# Altium PCB ATLAS_XP2V5_sredjen_bom.PcbDoc (part 3 of 4)
Units mil, origin at the board's own origin, x right, y up, seen from the top; angles counter-clockwise.
Board outline 6380 x 9190 mil, 4 copper layers (Primary Component Side, Ground Plane, Power Plane, Secondary Component Side), stack 35.4 mil thick; 203 components, 228 nets, 1212 pads, 912 vias.
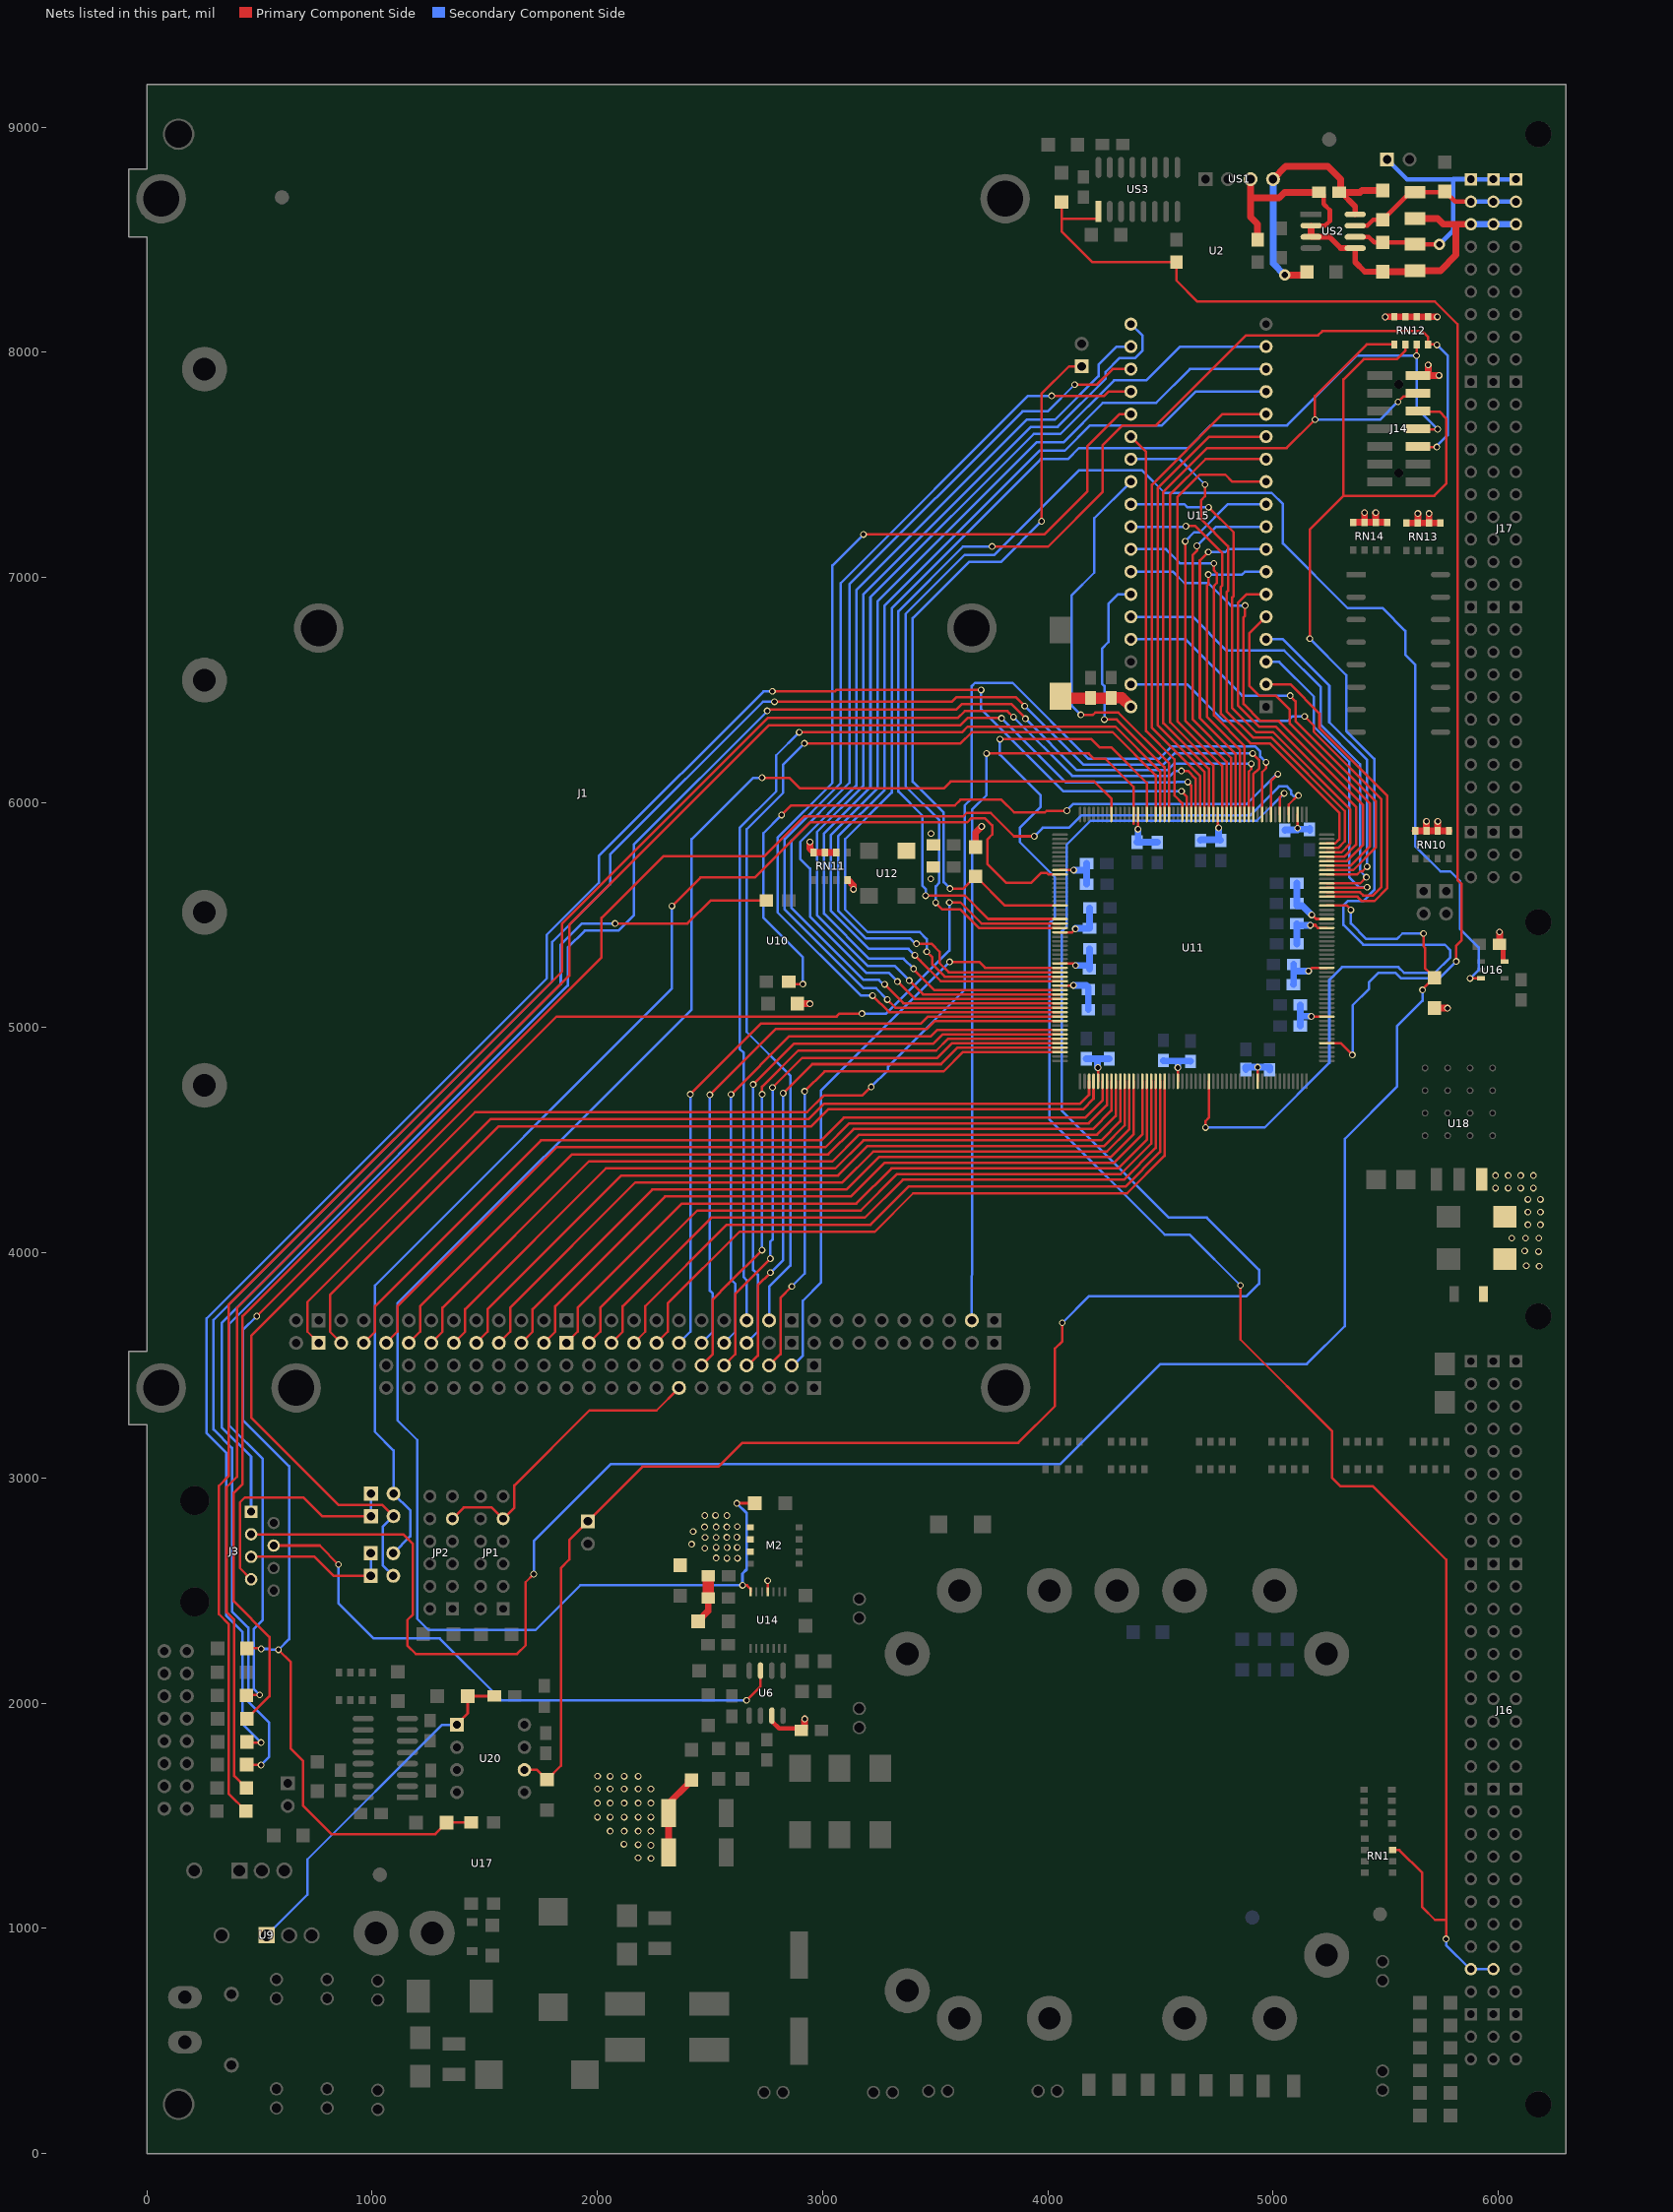
[diagram p5: the nets of this part, all layers, seen from the top]

## Via types
v1: diameter 30, hole 20, Primary Component Side to Secondary Component Side, 910 vias
v2: diameter 50, hole 28, Primary Component Side to Secondary Component Side, 2 vias

## Nets (pads, with @x,y where several pads share a name; then routed paths per layer and width w, separated by ;. In a path a pad name is that pad's centre, name@x,y a point inside that pad or via, vN(x,y) a via of type N, cw(c..) or ccw(c..) an arc to the next point about the centre after c; other vN are vias at no path point) (continued)
IRQ15: J1.D6 JP1.9 JP2.9 | length 1346
  Primary Component Side w11: JP2.9@1356.25,2818.75 1406.25,2868.75 1531.25,2868.75 JP1.9@1581.25,2818.75 1631.25,2868.75 1631.25,2967 1964.25,3300 2262.5,3300 J1.D6@2362.5,3400
LA17: J1.A14 U11.199 | length 2818.7
  Primary Component Side w11: v1(2499.15,4702.12) 2790.78,4993.75 3462.5,4993.75 3498.55,5029.8 U11.199@4053.75,5029.8
  Secondary Component Side w11: J1.A14@2462.5,3600 2512.5,3650 2512.5,3818.75 2499.15,3832.1 v1(2499.15,4702.12)
LA18: J1.A13 U11.201 | length 2711.9
  Primary Component Side w11: v1(2593.15,4703.3) 2852.35,4962.5 3481.25,4962.5 3509.15,4990.4 U11.201@4053.75,4990.4
  Secondary Component Side w11: J1.A13@2562.5,3600 2612.5,3650 2612.5,3862.5 2593.75,3881.25 2593.75,4703.3 v1(2593.15,4703.3)
LA19: J1.A12 U11.202 | length 2631.5
  Primary Component Side w11: v1(2691.61,4747.64) 2871.97,4928 3490.5,4928 3533.2,4970.7 U11.202@4053.75,4970.7
  Secondary Component Side w11: J1.A12@2662.5,3600 2712.5,3650 2712.5,3903 2691.61,3923.89 v1(2691.61,4747.64)
LA20: J1.C5 U11.203 | length 2759.9
  Primary Component Side w11: J1.C5@2462.5,3500 2512.5,3550 2512.5,3793.75 2581.25,3862.5 2581.5,3862.5 v1(2731.25,4012.25) ; v1(2731.49,4704.48) 2731.49,4737.5 2891.99,4898 3504.25,4898 3557.25,4951 U11.203@4053.75,4951
  Secondary Component Side w11: v1(2731.25,4012.25) 2731.25,4704.48 v1(2731.49,4704.48)
LA21: J1.C4 U11.204 | length 2690.2
  Primary Component Side w11: J1.C4@2562.5,3500 2612.5,3550 2612.5,3818.75 2612.75,3818.75 v1(2768,3974.5) ; v1(2777.6,4734.04) 2909.56,4866 3509.75,4866 3575.05,4931.3 U11.204@4053.75,4931.3
  Secondary Component Side w11: v1(2768,3974.5) 2768,4050 2777.6,4059.6 v1(2777.6,4734.04) ; v1(2777.6,4734.04) 2776.72,4733.72 2774.57,4737.07 v1(2777.6,4734.04)
LA22: J1.C3 U11.205 | length 2592.8
  Primary Component Side w11: J1.C3@2662.5,3500 2668.75,3500 2712.5,3543.75 2712.5,3856.25 2768,3911.75 v1(2768,3912) ; v1(2825.15,4708.95) 2954.21,4838 3525.5,4838 3599.1,4911.6 U11.205@4053.75,4911.6
  Secondary Component Side w11: v1(2768,3912) 2768.25,3912 2825,3968.75 2825,4708.95 v1(2825.15,4708.95)
LA23: J1.C2 U11.206 | length 2488.7
  Primary Component Side w11: J1.C2@2762.5,3500 2812.5,3550 2812.5,3800.5 v1(2863,3851) ; v1(2919.75,4717.22) 3008.52,4806 3537.25,4806 3623.15,4891.9 U11.206@4053.75,4891.9
  Secondary Component Side w11: v1(2863,3851) 2919.75,3907.75 v1(2919.75,4717.22)
LED_24VDC: R8.2 R11.2 U11.177 U17.4 | length 7804.2
  Primary Component Side w11: R11.2@443.53,2243.38 504.71,2243.38 v1(507.25,2240.85) ; v1(487.5,3718.75) 1818.75,5050 3062.5,5050 3075,5062.5 v1(3175,5062.5) ; v1(583.77,2236.95) 637.41,2183.31 637.41,1798.92 693.75,1742.58 693.75,1543.75 818.75,1418.75 1280,1418.75 R8.2@1330,1468.75 1330,1469.51 U17.4@1439.48,1469.51 U17.4@1439.48,1468.75 ; v1(3562.5,5556.25) 3612.5,5556.25 3705.55,5463.2 U11.177@4053.75,5463.2
  Secondary Component Side w11: v1(487.5,3718.75) 426,3657.25 426,3258 631.25,3052.75 631.25,2284.43 v1(583.77,2236.95) 547.46,2236.95 543.56,2240.85 v1(507.25,2240.85) ; v1(3175,5062.5) 3282.02,5062.5 3562.5,5342.98 v1(3562.5,5556.25)
LED_KVR: R18.1 U11.131 | length 7896.7
  Primary Component Side w11: R18.1@441.31,1622.97 387.5,1676.78 387.5,2370 353,2404.5 353,2959 400,3006 400,3756.25 1875,5231.25 1875,5456.25 2762.5,6343.75 3612.5,6343.75 3643.75,6375 3794.25,6375 v1(3794.25,6374.66) ; v1(4621.34,6090.98) 4636.25,6076.07 U11.131@4636.25,5947.2
  Secondary Component Side w11: v1(3794.25,6374.66) 4079.89,6089.02 4568.75,6089.02 4570.86,6091.13 4621.08,6091.13 v1(4621.34,6090.98)
LED_LPT: R20.1 U11.132 | length 8065.4
  Primary Component Side w11: R20.1@443.57,1827.77 443.57,1825 v1(506.25,1825) ; v1(2776.94,6494.01) 2787.5,6493.75 3054.66,6493.75 3060.59,6499.68 v1(3703.83,6499.68) ; v1(4593.75,6050) 4616.55,6027.2 U11.132@4616.55,5947.2
  Secondary Component Side w11: v1(506.25,1825) 425,1906.25 425,2315 351,2389 351,3113 265,3199 265,3708.75 1775,5218.75 1775,5412.5 2006.25,5643.75 2006.25,5762.5 2737.5,6493.75 2776.94,6493.75 v1(2776.94,6494.01) ; v1(3703.83,6499.68) 3703.83,6414.92 4068.75,6050 v1(4593.75,6050)
LED_MASTER_ENABLE: R21.1 U11.109 | length 7895.7
  Primary Component Side w11: R21.1@443.57,1931.25 R21.1@443.57,1930.17 543.75,2030.35 543.75,2294 385,2452.75 385,2934 425,2974 425,3718.75 2018.75,5312.5 2018.75,5487.5 2293.75,5762.5 2742,5762.5 2917.5,5938 3624,5938 3640,5954 3746,5954 3849.8,5850.2 v1(3940.04,5850.2) ; U11.109@5069.65,5947.2 5069.65,5991.04 5109.86,6031.25 v1(5112.5,6031.25)
  Secondary Component Side w11: v1(3940.04,5850.2) 3977.34,5887.5 4093.75,5887.5 4150,5943.75 4899.3,5943.75 5026.74,6071.2 5061.94,6071.2 5081.58,6051.56 5081.58,6037.5 5091.59,6027.49 5110.23,6027.49 v1(5112.5,6031.25)
LED_PWR_GOOD_TPS: R22.1 U11.118 | length 8126.5
  Primary Component Side w11: R22.1@442.01,2034.22 442.01,2037.5 500.5,2037.5 v1(500.5,2036.47) ; v1(2753.72,6406.96) 2759.79,6411.25 2759.79,6412.5 3593.75,6412.5 3618.75,6437.5 3837.5,6437.5 3900.87,6374.13 v1(3900.87,6372.01) ; U11.118@4892.35,5947.2 4892.35,6137.5 4903.52,6148.67 v1(4903.52,6171.93)
  Secondary Component Side w11: v1(500.5,2036.47) 475,2061.97 475,2330 514,2369 514,3085 365,3234 365,3683.75 1868.75,5187.5 1868.75,5356.25 1943.75,5431.25 2093.75,5431.25 2161.04,5498.54 2161.04,5812.5 2754.61,6406.07 v1(2753.72,6406.96) ; v1(3900.87,6372.01) 4129.12,6143.75 4531.25,6143.75 4559.43,6171.93 v1(4903.52,6171.93)
LED_RAD: R17.1 U11.130 | length 8127.9
  Primary Component Side w11: R17.1@439.8,1520.57 362.5,1597.87 362.5,2352 319,2395.5 319,2965 362.5,3008.5 362.5,3768.75 1843.75,5250 1843.75,5462.5 2756.25,6375 3600,6375 3631.25,6406.25 3820.92,6406.25 v1(3847.43,6379.74) ; v1(4593.23,6140.35) 4621.92,6140.35 4655.95,6106.33 U11.130@4655.95,5947.2
  Secondary Component Side w11: v1(3847.43,6379.74) 4108.42,6118.75 4543.75,6118.75 4565.35,6140.35 v1(4593.23,6140.35)
LED_WDT: R19.1 U11.117 | length 8551.4
  Primary Component Side w11: R19.1@453.44,1737.5 R19.1@442.81,1726.87 442.81,1725 v1(506.25,1725) ; v1(2786.1,6447.28) 2802,6447.32 3573,6447.32 3594.43,6468.75 3857.14,6468.75 v1(3897.24,6428.65) ; v1(4909.43,6217.89) 4937.5,6189.82 4937.5,6150.45 4912.05,6125 U11.117@4912.05,5947.2
  Secondary Component Side w11: v1(506.25,1725) 543,1761.75 543,1913.25 450,2006.25 450,2335 378,2407 378,3133 296,3215 296,3702.25 1800,5206.25 1800,5381.25 2056.25,5637.5 2056.25,5768.75 2734.82,6447.32 v1(2786.1,6447.28) ; v1(3897.24,6428.65) 4157.14,6168.75 4512.5,6168.75 4561.64,6217.89 v1(4909.43,6217.89)
LS: J3.4 U6.7 | length 2644
  Primary Component Side w11: J3.4@562.5,2700 767.31,2700 767.31,2699.14 v1(850.12,2615.96) ; v1(2662.3,2012.24) 2724.26,2074.2 U6.7@2724.26,2144.45
  Secondary Component Side w11: v1(850.12,2615.96) 850.12,2443.75 1006.37,2287.5 1300,2287.5 1575.23,2012.27 v1@2662.27,2012.27
MASTER_ENABLE: U10.2 U11.113 | length 3465.7
  Primary Component Side w11: v1(2817.73,5944.79) 2860.44,5987.5 3587.5,5987.5 3612.5,6012.5 3793.75,6012.5 3850,5956.25 3987.5,5956.25 3995.06,5963.81 4084.76,5963.81 v1(4084.85,5963.73) ; U10.2@2849.89,5204.69 2849.89,5193.75 v1(2912.5,5193.75) ; U11.113@4990.85,5947.2 4990.85,5984.7 4990.63,5984.91 4990.63,6095.23 v1(5021.44,6126.03)
  Secondary Component Side w11: v1(2817.73,5944.79) 2737.5,5864.56 2737.5,5487.5 2912.5,5312.5 v1(2912.5,5193.75) ; v1(4084.85,5963.73) 4078.68,5958.97 4077.57,5958.82 4112.5,5993.75 4883.64,5993.75 5016.01,6126.12 v1(5021.44,6126.03)
MASTER_ENABLE_OUT: J3.1 U10.4 | length 4190
  Primary Component Side w11: v1(2078.11,5462.68) 2400.18,5462.68 2502.19,5564.69 U10.4@2749.89,5564.69
  Secondary Component Side w12: J3.1@462.5,2850 462.5,3095 332,3225.5 332,3688.25 1837.5,5193.75 1837.5,5368.75 1931.43,5462.68 v1(2078.11,5462.68)
MRST: J16.B28 J16.C28 RN1.7 U11.141 | length 8008.3
  Primary Component Side w10.9: v1(3787.33,6281.51) 3837.5,6281.25 4193.75,6281.25 4231.25,6243.75 4283,6243.75 4439.25,6087.5 U11.141@4439.25,5947.2 ; v1(4855.42,3855.22) 4855.42,3614.95 5262.5,3207.87 5262.5,3000 5300,2962.5 5443.75,2962.5 5768.75,2637.5 5768.75,1037.5 ; RN1.7@5530.79,1347.4 5530.79,1347.51 5561.03,1347.51 5662.5,1246.04 5662.5,1093.75 5718.75,1037.5 5768.75,1037.5 ; v1(5768.24,952.62) 5769.14,952.92 5768.75,953.31 5768.75,1037.5
  Secondary Component Side w10.9: v1(3787.33,6281.51) 3787.33,6212.67 3968.75,6031.25 3968.75,5981.25 3875,5887.5 3875,5825 4031.25,5668.75 4031.25,5487.5 4006.25,5462.5 4006.25,4593.75 4518.75,4081.25 4629.39,4081.25 v1(4855.42,3855.22) ; v1(5768.24,952.62) 5768.44,952.92 5768.44,925.31 5875,818.75 5878.25,818.75 J16.C28@5878.5,818.5 J16.B28@5978.5,818.5
MS_IN_1: J3.3 R15.1 U11.88 | length 8724.2
  Primary Component Side w11: J3.3@462.5,2750 1137.5,2750 1181.25,2706.25 1181.25,2393.75 1156.25,2368.75 1156.25,2256.25 1193.75,2218.75 1643.75,2218.75 1681.25,2256.25 1681.25,2537.03 v1(1717.32,2573.1) ; U11.88@5238.45,5542 5328.56,5542 5347.76,5522.8 v1(5345.84,5522.8) ; v1(5667.82,5418.4) 5667.82,5361.79 5674.78,5354.83 5674.78,5264.45 5692.68,5246.56 5692.68,5222.06 R15.1@5717.18,5222.06
  Primary Component Side w12: v1(5663.45,5167.87) 5662.74,5167.87 5662.74,5171 5697.44,5205.69 5717.18,5205.69 R15.1@5717.18,5222.06
  Secondary Component Side w11: v1(1717.32,2573.1) 1717.32,2718.75 2061.07,3062.5 4056.25,3062.5 4500,3506.25 5150,3506.25 5318.75,3675 5318.75,4506.25 5550,4737.5 5550,5006.25 5663.45,5119.7 v1(5663.45,5167.87) ; v1(5345.84,5522.8) 5345.84,5462.5 5414.59,5393.75 5550,5393.75 5574.65,5418.4 v1(5667.82,5418.4)
NVRAM_ADDRESS0: U11.129 U15.14 | length 2189
  Primary Component Side w11: U11.129@4675.65,5947.2 4675.65,6118.75 4462.5,6331.9 4462.5,7412 4775.5,7725 U15.14@4968.75,7725
NVRAM_ADDRESS1: U11.128 U15.13 | length 2111
  Primary Component Side w11: U11.128@4695.35,5947.2 4695.35,6135.9 4487.5,6343.75 4487.5,7396 4716.5,7625 U15.13@4968.75,7625
NVRAM_ADDRESS2: U11.126 U15.12 | length 1990.4
  Primary Component Side w11: U11.126@4734.75,5947.2 4734.75,6165.25 4543.75,6356.25 4543.75,7368.75 4700,7525 U15.12@4968.75,7525
NVRAM_ADDRESS3: U11.124 U15.11 | length 1939.7
  Primary Component Side w11: U11.124@4774.15,5947.2 4774.15,6163.35 4575,6362.5 4575,7356.25 4675,7456.25 4787.5,7456.25 4818.75,7425 U15.11@4968.75,7425
NVRAM_ADDRESS4: U11.123 U15.10 | length 1716.9
  Primary Component Side w11: v1(4609.68,7160.05) 4610.25,7160.11 4610.25,6364.75 4793.85,6181.15 U11.123@4793.85,5947.2
  Secondary Component Side w11: v1(4609.68,7160.05) 4649.63,7200 4675,7200 4800,7325 U15.10@4968.75,7325
NVRAM_ADDRESS5: U11.122 U15.9 | length 1612.7
  Primary Component Side w11: v1(4662,7140) 4662,7118.25 4643.75,7100 4643.75,6368.75 4813.55,6198.95 U11.122@4813.55,5947.2
  Secondary Component Side w11: v1(4662,7140) 4747,7225 U15.9@4968.75,7225
NVRAM_ADDRESS6: U11.121 U15.8 | length 1507.8
  Primary Component Side w11: v1(4712.5,7112.5) 4675,7075 4675,6375 4833.25,6216.75 U11.121@4833.25,5947.2
  Secondary Component Side w11: v1(4712.5,7112.5) 4787.5,7112.5 4800,7125 U15.8@4968.75,7125
NVRAM_ADDRESS7: U11.120 U15.7 | length 1390.1
  Primary Component Side w11: v1(4712.5,7012.5) 4712.5,6968.75 4706.25,6962.5 4706.25,6381.25 4852.95,6234.55 U11.120@4852.95,5947.2
  Secondary Component Side w11: v1(4712.5,7012.5) 4862.5,7012.5 4875,7025 U15.7@4968.75,7025
NVRAM_ADDRESS8: U11.119 U15.29 | length 1576.3
  Primary Component Side w11: v1(4737.5,7062.5) 4737.5,7031.25 4750,7018.75 4750,6975 4737.5,6962.5 4737.5,6387.5 4872.65,6252.35 U11.119@4872.65,5947.2
  Secondary Component Side w11: U15.29@4368.75,7125 4525,7125 4587.5,7062.5 v1(4737.5,7062.5)
NVRAM_ADDRESS9: U11.102 U15.28 | length 2063.4
  Primary Component Side w11: v1(4613.33,7227.61) 4655,7227.61 4775,7107.61 4775,6964.29 4768.75,6958.04 4768.75,6393.75 4900,6262.5 4986.19,6262.5 5293.75,5954.94 5293.75,5836.43 5275.12,5817.8 U11.102@5238.45,5817.8
  Secondary Component Side w11: U15.28@4368.75,7225 4612.5,7225 4612.87,7227.67 4612.91,7227.95 v1(4613.33,7227.61)
NVRAM_ADDRESS10: U11.101 U15.25 | length 2376.7
  Primary Component Side w11: v1(4697.92,7412.34) 4697.92,7359.95 4681.25,7343.28 4681.25,7257.18 4800,7138.43 4800,6941.09 4793.75,6934.84 4793.75,6406.25 4912.5,6287.5 4993.75,6287.5 5318.75,5962.5 5318.75,5827.9 5288.95,5798.1 U11.101@5238.45,5798.1
  Secondary Component Side w11: U15.25@4368.75,7525 4585.26,7525 v1(4697.92,7412.34)
NVRAM_ADDRESS11: U11.100 U15.27 | length 2275.3
  Primary Component Side w11: v1(4714,7311) 4825,7200 4825,6917.25 4818.75,6911 4818.75,6418.75 4925,6312.5 5000,6312.5 5343.75,5968.75 5343.75,5818.75 5303.4,5778.4 U11.100@5238.45,5778.4
  Secondary Component Side w11: U15.27@4368.75,7325 4606.25,7325 4620.25,7311 v1(4714,7311)
NVRAM_ADDRESS12: U11.99 U15.6 | length 1628.6
  Primary Component Side w11: U15.6@4968.75,6925 4882.87,6925 4843.75,6885.88 4843.75,6431.25 4937.5,6337.5 5012.5,6337.5 5368.75,5981.25 5368.75,5812.5 5314.95,5758.7 U11.99@5238.45,5758.7
NVRAM_ADDRESS13: U11.98 U15.30 | length 2094.5
  Primary Component Side w11: v1(4876,6875) 4876,6829.93 4868.75,6822.68 4868.75,6437.5 4943.75,6362.5 5025,6362.5 5400,5987.5 5400,5812.5 5326.5,5739 U11.98@5238.45,5739
  Secondary Component Side w11: U15.30@4368.75,7025 4556.25,7025 4606.25,6975 4712.5,6975 4812.5,6875 v1(4876,6875)
NVRAM_ADDRESS14: U11.97 U15.5 | length 1545.2
  Primary Component Side w11: U15.5@4968.75,6825 4893.75,6750 4893.75,6518.75 4937.5,6475 5012.5,6475 5075,6412.5 5075,6350 5431.25,5993.75 5431.25,5806.25 5344.3,5719.3 U11.97@5238.45,5719.3
NVRAM_ADDRESS15: U11.96 U15.33 | length 1903.1
  Primary Component Side w11: v1(5076,6475) 5075.5,6474.5 5100,6450 5100,6362.5 5456.25,6006.25 5456.25,5800 5355.85,5699.6 U11.96@5238.45,5699.6
  Secondary Component Side w11: U15.33@4368.75,6725 4612.5,6725 4862.5,6475 v1(5076,6475)
NVRAM_ADDRESS16: U11.95 U15.4 | length 1442.8
  Primary Component Side w11: U11.95@5238.45,5679.9 5372.61,5679.9 5386.46,5693.75 5397.02,5693.75 v1(5418.1,5714.84) 5417.86,5706.75 v1@5417.98,5706.75
  Secondary Component Side w11: U15.4@4968.75,6725 5043.75,6725 5250,6518.75 5250,6356.25 5417.71,6188.54 5417.71,5714.84 v1(5418.1,5714.84)
NVRAM_ADDRESS17: U11.93 U15.32 | length 2088.3
  Primary Component Side w11: U11.93@5238.45,5640.5 5386.47,5640.5 v1(5414.24,5668.28)
  Secondary Component Side w11: U15.32@4368.75,6825 4643.75,6825 4793.75,6675 5050,6675 5212.5,6512.5 5212.5,6343.75 5386.56,6169.69 5386.56,5695.96 v1(5414.24,5668.28)
NVRAM_ADDRESS18: U11.92 U15.3 | length 1422.7
  Primary Component Side w11: U11.92@5238.45,5620.8 5413.69,5620.8 5413.73,5620.76 5416.53,5623.56 v1(5417.8,5623.71)
  Secondary Component Side w11: U15.3@4968.75,6625 5027,6625 5181.25,6470.75 5181.25,6337.5 5337.5,6181.25 5337.5,5668.75 5382.69,5623.56 5416.53,5623.56 v1(5417.8,5623.71)
NVRAM_ADDRESS19: U11.91 U15.35 | length 2009.3
  Primary Component Side w11: v1(5140.12,6382.51) 5181.25,6341.38 5181.25,6314.5 5481.25,6014.5 5481.25,5625 5443.75,5587.5 5400,5587.5 5386.4,5601.1 U11.91@5238.45,5601.1
  Secondary Component Side w11: U15.35@4368.75,6525 4618.75,6525 4780.75,6363 5066,6363 5085.51,6382.51 v1(5140.12,6382.51)
NVRAM_ADDRESS20: U11.90 U15.2 | length 1491
  Primary Component Side w11: U15.2@4968.75,6525 5076.68,6525 5206.25,6395.43 5206.25,6331.25 5506.25,6031.25 5506.25,5618.75 5450,5562.5 5393.9,5562.5 5375,5581.4 U11.90@5238.45,5581.4
NVRAM_CE: U11.133 U15.24 | length 1772.3
  Primary Component Side w10.9: U15.24@4368.75,7625 4436,7557.75 4436,6318 4562.5,6191.5 4562.5,6031.25 4596.85,5996.9 U11.133@4596.85,5947.2
NVRAM_DATA0: U11.188 U15.15 | length 4658.3
  Primary Component Side w11: v1@3413.74,5372.84 v1(3416.77,5372.84) 3483.41,5372.84 3518.75,5337.5 3518.75,5287.4 3559.65,5246.5 U11.188@4053.75,5246.5
  Secondary Component Side w11: v1(3416.77,5372.84) 3413.06,5371.9 3388.96,5396 3193.75,5396 3068.75,5521 3068.75,5850 3275,6056.25 3275,6875 3962.5,7562.5 4075,7562.5 4187.5,7675 4506.25,7675 4656.25,7825 U15.15@4968.75,7825
NVRAM_DATA1: U11.190 U15.16 | length 4758.1
  Primary Component Side w11: v1(3409.95,5321.65) 3434,5297.59 3434,5297.25 3524.15,5207.1 U11.190@4053.75,5207.1
  Secondary Component Side w11: v1(3409.95,5321.65) 3381.59,5350 3206.25,5350 3037.5,5518.75 3037.5,5856.25 3243.75,6062.5 3243.75,6893.75 3950,7600 4068.75,7600 4243.75,7775 4481.25,7775 4631.25,7925 U15.16@4968.75,7925
NVRAM_DATA2: U11.192 U15.17 | length 4898.9
  Primary Component Side w11: v1(3403.84,5261.67) 3410,5256 3410,5252.5 3494.8,5167.7 U11.192@4053.75,5167.7
  Secondary Component Side w11: v1(3403.84,5261.67) 3404.08,5261.92 3359.75,5306.25 3206.25,5306.25 3006.25,5506.25 3006.25,5862.5 3212.5,6068.75 3212.5,6912.5 3937.5,7637.5 4056.25,7637.5 4293.75,7875 4437.5,7875 4587.5,8025 U15.17@4968.75,8025
NVRAM_DATA3: U11.193 U15.19 | length 4599.7
  Primary Component Side w11: v1(3384.63,5208.95) 3378,5215.75 3445.75,5148 U11.193@4053.75,5148
  Secondary Component Side w11: v1(3384.63,5208.95) 3378,5217 3320,5275 3200,5275 2975,5500 2975,5868.75 3181.25,6075 3181.25,6925 3925,7668.75 4043.75,7668.75 4256.25,7881.25 4256.25,7912.5 4318.75,7975 4388,7975 4421,8008 4421,8072.75 U15.19@4368.75,8125
NVRAM_DATA4: U11.194 U15.20 | length 4529
  Primary Component Side w11: v1(3332,5205) 3332.5,5205 3409.2,5128.3 U11.194@4053.75,5128.3
  Secondary Component Side w11: v1(3332,5205) 3293.25,5243.75 3193.75,5243.75 2943.75,5493.75 2943.75,5706.25 2900,5750 2900,5825 3150,6075 3150,6943.75 3906.25,7700 4031.25,7700 4225,7893.75 4225,7943.75 4306.25,8025 U15.20@4368.75,8025
NVRAM_DATA5: U11.195 U15.21 | length 4557
  Primary Component Side w11: v1(3275.43,5192.76) 3282.15,5185 3358.55,5108.6 U11.195@4053.75,5108.6 ; v1(4119,7856) 4118.75,7856.25 4218.75,7856.25 4287.5,7925 U15.21@4368.75,7925
  Secondary Component Side w11: v1(3275.43,5192.76) 3275.33,5192.67 3269.83,5192.67 3250,5212.5 3181.25,5212.5 2862.5,5531.25 2862.5,5831.25 3118.75,6087.5 3118.75,6968.75 3887.5,7737.5 4000,7737.5 4118.5,7856 v1(4119,7856)
NVRAM_DATA6: U11.196 U15.22 | length 4604.5
  Primary Component Side w11: v1(3287.5,5125) 3285.39,5127.11 3284.61,5127.11 3322.82,5088.9 U11.196@4053.75,5088.9 ; v1(4017,7806) 4017.25,7806.25 4250,7806.25 4268.75,7825 U15.22@4368.75,7825
  Secondary Component Side w11: v1(3287.5,5125) 3237.5,5175 3181.25,5175 2831.25,5525 2831.25,5837.5 3081.25,6087.5 3081.25,6975 3912.5,7806.25 4017.25,7806.25 v1(4017,7806)
NVRAM_DATA7: U11.197 U15.23 | length 4799.5
  Primary Component Side w11: v1(3181.19,7190.7) 3984.45,7190.7 4175,7381.25 4175,7581.25 4318.75,7725 U15.23@4368.75,7725 ; v1(3221.8,5142.19) 3294.79,5069.2 U11.197@4053.75,5069.2
  Secondary Component Side w11: v1(3181.19,7190.7) 3043.75,7053.26 3043.75,6087.5 2800,5843.75 2800,5512.5 3170.31,5142.19 v1(3221.8,5142.19)
NVRAM_OE: U11.136 U15.26 | length 1877.3
  Primary Component Side w11: v1(4146.75,6389.64) 4200.38,6389.64 4210.73,6400 4312.93,6400 4537.75,6175.18 U11.136@4537.75,5947.2
  Secondary Component Side w11: v1(4146.75,6389.64) 4106.25,6430.14 4106.25,6921 4206.25,7021 4206.25,7262.5 U15.26@4368.75,7425
NVRAM_RST: U11.178 U16.3 | length 6614.8
  Primary Component Side w11: v1(3501.99,5555.25) 3532.23,5525 3612.5,5525 3694,5443.5 U11.178@4053.75,5443.5 ; v1(5875,5218.75) 5875,5218.85 U16.3@5922.76,5218.85
  Secondary Component Side w11: v1(3501.99,5555.25) 3502.69,5546.02 3502.69,5628.06 3518.5,5643.87 3518.5,5922 3368.75,6071.75 3368.75,6837.5 3631.25,7100 3762.5,7100 4137.5,7475 4418.75,7475 4518.75,7375 4993.75,7375 5043.75,7325 5043.75,7150.75 5332,6862.5 5487.5,6862.5 5587.5,6762.5 5587.5,6656.25 5631.25,6612.5 5631.25,5806.25 5743.75,5693.75 5787.5,5693.75 5831.25,5650 5831.25,5437.5 5912.5,5356.25 5912.5,5256.25 v1(5875,5218.75)
NVRAM_WE: U11.137 U15.31 | length 1211.6
  Primary Component Side w10.9: v1(4250.99,6368.8) 4306.25,6368.8 4518.05,6157 U11.137@4518.05,5947.2
  Secondary Component Side w10.9: v1(4250.99,6368.8) 4250.99,6517.76 4240,6528.75 4240,6683.75 4268.75,6712.5 4268.75,6881.25 4312.5,6925 U15.31@4368.75,6925
OUT1: J3.7 J5.1 J8.1 | length 1088.1
  Primary Component Side w11: J3.7@462.5,2550 413,2599.5 413,2892 435,2914 694,2914 777.62,2830.38 J8.1@994.82,2830.38
  Secondary Component Side w11: J8.1@994.82,2830.38 J5.1@994.82,2930.38
OUT2: J3.5 J6.1 J7.1 | length 666
  Primary Component Side w11: J3.5@462.5,2650 743.75,2650 828,2565.75 J7.1@993.65,2565.75
  Secondary Component Side w11: J7.1@993.65,2565.75 J6.1@993.65,2665.75
PPM_+485: J17.A1 J17.B1 J17.C1 JP6.1 R31.1 US2.6 ZD2.2 | length 1389.8
  Primary Component Side w20: US2.6@5364.75,8512.5 5425,8512.5 5450,8487.5 R31.1@5487.5,8487.5 5623.25,8487.5 ZD2.2@5631.25,8479.5 v2(5739.25,8479.5)
  Secondary Component Side w20: JP6.1@5506.25,8856.25 5594,8768.5 5800,8768.5 ; v2(5739.25,8479.5) 5800,8540.25 5800,8768.5 ; J17.A1@6078.5,8768.5 J17.B1@5978.5,8768.5 J17.C1@5878.5,8768.5 ; 5800,8768.5 5800,8768.75 5878.25,8768.75 J17.C1@5878.5,8768.5 ; 5800,8768.5 J17.C1@5878.5,8768.5
PPM_-485: J17.A2 J17.B2 J17.C2 R25.2 R32.2 US2.7 ZD3.2 | length 795.1
  Primary Component Side w20: US2.7@5364.75,8562.5 5418.25,8562.5 5444.5,8588.75 R25.2@5487.5,8588.75 5609.5,8710.75 ZD3.2@5631.25,8710.75 5759.5,8710.75 R32.2@5762.5,8713.75 5807.75,8668.5 J17.C2@5878.5,8668.5
  Secondary Component Side w20: J17.C2@5878.5,8668.5 J17.B2@5978.5,8668.5 J17.A2@6078.5,8668.5
PPM_GND: C1.2 J17.A3 J17.B3 J17.C3 R31.2 U2.2 US1.3 US2.2 US2.3 US2.5 ZD2.1 ZD3.1 | length 2266.3
  Primary Component Side w20: US2.2@5168.75,8562.5 5231.75,8562.5 5252,8582.75 5252,8631 5224.13,8658.87 5224.13,8695.22 5223.03,8710.22 C1.2@5204.13,8710.22
  Primary Component Side w25: 5168.75,8525 US2.3@5168.75,8512.5 5250,8512.5 5300,8462.5 US2.5@5364.75,8462.5 5364.75,8400 5407.25,8357.5 R31.2@5487.5,8357.5 ; US2.2@5168.75,8550 US2.2@5168.75,8562.5
  Primary Component Side w30: US1.3@4900,8768.75 4900,8686 ; U2.2@4931.25,8500 4931.25,8568.75 4900,8600 4900,8686 ; 5168.75,8525 US2.2@5168.75,8550 ; C1.2@5204.13,8710.22 5051.22,8710.22 5026,8685 4984,8685 4983,8686 4900,8686 ; R31.2@5487.5,8357.5 5626.25,8357.5 ZD2.1@5631.25,8362.5 5743.75,8362.5 5812.5,8431.25 5812.5,8568.5 ; ZD3.1@5631.25,8593.75 5731.25,8593.75 5756.5,8568.5 5812.5,8568.5 ; J17.C3@5878.5,8568.5 5812.5,8568.5
  Secondary Component Side w30: J17.C3@5878.5,8568.5 J17.B3@5978.5,8568.5 J17.A3@6078.5,8568.5
PPM_NOVI: R2.2 U2.4 U11.57 US3.1 | length 6098.6
  Primary Component Side w11: R2.2@4064.08,8666.73 R2.2@4061.04,8666.73 4061.04,8593.75 ; US3.1@4218.75,8618.75 US3.1@4225,8625 4225,8593.75 4061.04,8593.75 ; U2.4@4571.25,8401.98 U2.4@4571.25,8400 ; U11.57@5238.45,4931.3 5300.23,4931.3 v1(5352.27,4879.25) ; v1(5813.25,5294.3) 5813.25,5364.41 5837.5,5388.67 5837.5,5637.5 5818.75,5656.25 5818.75,8125 5718.75,8225 4665,8225 4571.25,8318.75 U2.4@4571.25,8400 ; 4061.04,8593.75 4061.04,8537 4198.04,8400 U2.4@4571.25,8400
  Secondary Component Side w11: v1(5352.27,4879.25) 5353.96,4879.25 5353.96,5100 5425,5171.04 5425,5200 5468.75,5243.75 5543.75,5243.75 5568.75,5218.75 5737.69,5218.75 v1(5813.25,5294.3)
PPM_VCC: C1.1 R1.1 R25.1 US1.4 US2.8 | length 1292.8
  Primary Component Side w25: C1.1@5298.41,8710.22 5300,8711.81 5300.15,8711.96 5301.89,8710.22 5364.75,8647.35 US2.8@5364.75,8612.5
  Primary Component Side w30: US1.4@5000,8768.75 5056.25,8825 5243.75,8825 5300,8768.75 5300,8711.81 C1.1@5300,8710.22 ; v2(5051.84,8343.39) 5075,8342 5150,8342 R1.1@5150,8356.25 ; C1.1@5294.13,8710.22 5298.41,8710.22 C1.1@5300,8710.22 ; R25.1@5487.5,8718.75 5395.08,8718.75 5386.55,8710.22 5301.89,8710.22 C1.1@5300,8710.22
  Secondary Component Side w30: US1.4@5000,8768.75 5000,8393.84 5051.84,8342 v2(5051.84,8343.39)
PWR_GOOD_TPS: R28.2 U11.149 U14.14 | length 8224.9
  Primary Component Side w10: 2663.82,2523.68 2664.25,2523.68 ; U14.14@2679.72,2494.27 U14.14@2679.72,2508.21
  Primary Component Side w11: v1(2730.77,6110.23) 2852.27,6110.23 2900,6062.5 3537.5,6062.5 3568.75,6093.75 4206.25,6093.75 4281.65,6018.35 U11.149@4281.65,5947.2
  Primary Component Side w12: v1(2618.75,2887.5) 2699.15,2887.5 R28.2@2699.15,2888.41 ; v1(2644.56,2523.68) 2663.82,2523.68 ; 2664.25,2523.68 U14.14@2679.72,2508.21
  Secondary Component Side w11: v1(2644.56,2523.68) 2643.75,2523.68 1923.68,2523.68 1725,2325 1250,2325 1200,2375 1200,3168.75 1112.5,3256.25 1112.5,3775 2418.75,5081.25 2418.75,5837.5 2691.48,6110.23 v1(2730.77,6110.23)
  Secondary Component Side w12: v1(2618.75,2887.5) 2662.5,2843.75 2662.5,2593.75 2643.75,2575 v1@2643.75,2523.68
RES_DRV: J1.B2 U11.144 | length 3422.8
  Primary Component Side w11: v1(3727.87,6217.91) 3801.34,6217.88 4181.25,6217.88 4205.38,6193.75 4256.25,6193.75 4380.15,6069.85 U11.144@4380.15,5947.2 4380.15,5905.15
  Secondary Component Side w11: J1.B2@3662.5,3700 3663.75,4100 3663.75,5968.75 3727.87,6032.87 v1(3727.87,6217.91)
RESERVE1: J5.2 J6.2 U11.166 | length 5671.7
  Primary Component Side w11: v1(2331,5540) 2458,5667 2699,5667 2944,5912 3642,5912 3661,5931 3720.5,5931 3753,5898.5 3753,5858 3732,5837 3732,5726 3814,5644 3926.62,5644 3969.62,5687 3996.39,5687 4003.49,5679.9 U11.166@4053.75,5679.9
  Secondary Component Side w11: J6.2@1093.65,2665.75 1168.75,2740.85 1168.75,2856.46 J5.2@1094.82,2930.38 1094.82,3122.18 1012,3205 1012,3855 2331,5174 v1(2331,5540)
RESERVE2: J7.2 J8.2 U11.115 | length 8414.3
  Primary Component Side w11: J8.2@1094.82,2830.38 1043.96,2881.25 850,2881.25 462.5,3268.75 462.5,3631.25 1456.25,4625 2931.25,4625 3006.25,4700 3177.01,4700 3214.66,4737.65 v1(3215.56,4737.2) ; U11.115@4951.45,5947.2 4951.45,6134.55 4968.93,6152.03 4968.93,6171.39 v1(4969.16,6178.31)
  Secondary Component Side w11: J7.2@1093.65,2565.75 1046.65,2612.75 1046.65,2782.21 J8.2@1094.82,2830.38 ; v1(3215.56,4737.2) 3291,4812.64 3291,4827.74 3631.25,5167.99 3631.25,5987.5 3662.5,6018.75 3662.5,6517.5 3676.25,6531.25 3843.75,6531.25 4181.25,6193.75 4493.5,6193.75 4549.75,6250 4920.45,6250 4943.75,6226.7 4943.75,6203.72 v1(4969.16,6178.31)
RESET_TASTER: C56.1 R24.1 U9.1 U20.1 | length 1589.5
  Primary Component Side w12: U20.1@1375.98,1903.97 1375.98,1906.99 1423.75,1954.76 R24.1@1423.75,2031.25 C56.1@1542.5,2031.25
  Secondary Component Side w11: U9.1@531.25,968.75 712.5,1150 712.5,1306.25 1310.22,1903.97 U20.1@1375.98,1903.97
RST_CPU_5V_MONITOR: JP5.1 R62.1 U11.111 U20.6 | length 8538.4
  Primary Component Side w11: U20.6@1675.98,1703.97 1731.92,1703.97 R62.1@1775.84,1660.04 1837.5,1721.7 1837.5,2600 1875,2637.5 1875,2724.7 JP5.1@1958.06,2807.76 2200.3,3050 2537.5,3050 2643.75,3156.25 3868.75,3156.25 4031.25,3318.75 4031.25,3575 4064.29,3608.04 v1(4064.29,3689.16) ; U11.111@5030.25,5947.2 5030.25,6024 5046.95,6040.7 v1(5049.3,6040.7)
  Secondary Component Side w11: v1(4064.29,3689.16) 4064.22,3689.22 4181.25,3806.25 4881.25,3806.25 4937.5,3862.5 4937.5,3925 4706.25,4156.25 4537.5,4156.25 4062.5,4631.25 4062.5,5428.5 4083,5449 4083,5812 4190,5919 4927.61,5919 v1(5049.3,6040.7)
RST_DOF_EN: J18.1 R30.1 U11.173 | length 3378.8
  Primary Component Side w11: v1(3565.61,5618.03) 3624.94,5618.03 R30.1@3679.37,5672.47 3809.84,5542 U11.173@4053.75,5542 ; v1(3971.97,7249.36) 3971.97,7815 4094.47,7937.5 J18.1@4150,7937.5
  Secondary Component Side w11: v1(3565.61,5618.03) 3537.5,5646.14 3537.5,5955 3400,6092.5 3400,6818.75 3650,7068.75 3791.36,7068.75 v1(3971.97,7249.36)
SA0: J1.A31 U11.3 | length 4114.6
  Primary Component Side w11: J1.A31@762.5,3600 712.5,3650 712.5,3781.25 1525,4593.75 2937.5,4593.75 3006.25,4662.5 4143.75,4662.5 4183.15,4701.9 U11.3@4183.15,4762.5
SA1: J1.A30 U11.4 | length 4063
  Primary Component Side w11: J1.A30@862.5,3600 812.5,3650 812.5,3812.5 1562.5,4562.5 2950,4562.5 3025,4637.5 4156.25,4637.5 4202.85,4684.1 U11.4@4202.85,4762.5
SA2: J1.A29 U11.6 | length 3877.6
  Primary Component Side w11: J1.A29@962.5,3600 1012.5,3650 1012.5,3762.5 1750,4500 2993.75,4500 3093.75,4600 4165.75,4600 4242.25,4676.5 U11.6@4242.25,4762.5
SA3: J1.A28 U11.7 | length 3809.4
  Primary Component Side w11: J1.A28@1062.5,3600 1112.5,3650 1112.5,3762.5 1818.75,4468.75 3012.5,4468.75 3118.75,4575 4181.25,4575 4261.95,4655.7 U11.7@4261.95,4762.5
SA4: J1.A27 U11.8 | length 3743.2
  Primary Component Side w11: J1.A27@1162.5,3600 1212.5,3650 1212.5,3762.5 1887.5,4437.5 3025,4437.5 3137.5,4550 4200,4550 4281.65,4631.65 U11.8@4281.65,4762.5
SA5: J1.A26 U11.9 | length 3673.4
  Primary Component Side w11: J1.A26@1262.5,3600 1312.5,3650 1312.5,3756.25 1962.5,4406.25 3043.75,4406.25 3162.5,4525 4218.75,4525 4301.35,4607.6 U11.9@4301.35,4762.5
SA6: J1.A25 U11.10 | length 3603.5
  Primary Component Side w11: J1.A25@1362.5,3600 1412.5,3650 1412.5,3750 2037.5,4375 3056.25,4375 3181.25,4500 4237.5,4500 4321.05,4583.55 U11.10@4321.05,4762.5
SA7: J1.A24 U11.11 | length 3533.6
  Primary Component Side w11: J1.A24@1462.5,3600 1512.5,3650 1512.5,3750 2106.25,4343.75 3068.75,4343.75 3200,4475 4250,4475 4340.75,4565.75 U11.11@4340.75,4762.5
SA8: J1.A23 U11.12 | length 3467.4
  Primary Component Side w11: J1.A23@1562.5,3600 1612.5,3650 1612.5,3756.25 2168.75,4312.5 3087.5,4312.5 3225,4450 4262.5,4450 4360.45,4547.95 U11.12@4360.45,4762.5
SA9: J1.A22 U11.13 | length 3396.2
  Primary Component Side w11: J1.A22@1662.5,3600 1712.5,3650 1712.5,3750 2243.75,4281.25 3106.25,4281.25 3250,4425 4279.05,4425 4380.15,4526.1 U11.13@4380.15,4762.5
SA10: J1.A21 U11.15 | length 3343.1
  Primary Component Side w11: J1.A21@1762.5,3600 1812.5,3650 1812.5,3762.5 2300,4250 3125,4250 3275,4400 4293.75,4400 4419.55,4525.8 U11.15@4419.55,4762.5
SA11: J1.A20 U11.16 | length 3273.3
  Primary Component Side w11: J1.A20@1862.5,3600 1912.5,3650 1912.5,3756.25 2375,4218.75 3150,4218.75 3306.25,4375 4312.5,4375 4439.25,4501.75 U11.16@4439.25,4762.5
SA12: J1.A19 U11.17 | length 3202.9
  Primary Component Side w11: J1.A19@1962.5,3600 2012.5,3650 2012.5,3756.25 2443.75,4187.5 3168.75,4187.5 3331.25,4350 4324.15,4350 4458.95,4484.8 U11.17@4458.95,4762.5
SA13: J1.A18 U11.18 | length 3137.2
  Primary Component Side w11: J1.A18@2062.5,3600 2112.5,3650 2112.5,3762.5 2506.25,4156.25 3187.5,4156.25 3356.25,4325 4337.5,4325 4478.65,4466.15 U11.18@4478.65,4762.5
SA14: J1.A17 U11.19 | length 3067.3
  Primary Component Side w11: J1.A17@2162.5,3600 2212.5,3650 2212.5,3762.5 2575,4125 3212.5,4125 3381.5,4294 4344,4294 4498.35,4448.35 U11.19@4498.35,4762.5
SA15: J1.A16 U11.20 | length 3004.7
  Primary Component Side w11: J1.A16@2262.5,3600 2312.5,3650 2312.5,3775 2631.25,4093.75 3231.25,4093.75 3401.5,4264 4351.5,4264 4518.05,4430.55 U11.20@4518.05,4762.5
SA16: J1.A15 U11.198 | length 2909.9
  Primary Component Side w11: v1(2412.25,4704.48) 2726.51,5018.75 3437.5,5018.75 3468.25,5049.5 U11.198@4053.75,5049.5
  Secondary Component Side w11: J1.A15@2362.5,3600 2412.5,3650 2412.5,4704.48 v1(2412.25,4704.48)
SBHE: J1.C1 U11.187 | length 2586.7
  Primary Component Side w11: v1(3564,5292) 3695.5,5292 3721.3,5266.2 U11.187@4053.75,5266.2
  Secondary Component Side w11: J1.C1@2862.5,3500 2868.75,3500 2912.5,3543.75 2912.5,3787.5 2993.75,3868.75 2993.75,4721.75 v1(3564,5292)
SMEMR: J1.B12 U11.138 | length 4621.6
  Primary Component Side w10.9: v1(2896.25,6312) 3618.75,6312 3644.25,6337.5 4300,6337.5 4498.35,6139.15 U11.138@4498.35,5947.2
  Secondary Component Side w10.9: J1.B12@2662.5,3700 2662.5,3879 2650,3891.5 2650,4887.5 2631.25,4906.25 2631.25,5887.5 2793.75,6050 2793.75,6209.75 v1(2896.25,6312)
SMEMW: J1.B11 U11.139 | length 4621.7
  Primary Component Side w10.9: v1(2919.25,6263) 3612.5,6263 3662,6312.5 4287.5,6312.5 4478.65,6121.35 U11.139@4478.65,5947.2
  Secondary Component Side w10.9: J1.B11@2762.5,3700 2762.5,3850 2856.25,3943.75 2856.25,4787.5 2662.5,4981.25 2662.5,5881.25 2825,6043.75 2825,6169 v1(2919.25,6263)
TCK: J14.6 RN12.6 U11.30 | length 6369.4
  Primary Component Side w11: v1(4700,4556.25) 4700,4584.95 4715.05,4600 U11.30@4715.05,4762.5 ; v1(5162.83,6728.18) 5162.83,7212.83 5312.5,7362.5 ; RN12.6@5588.46,8034.66 5588.46,8007.21 5550,7968.75 5402.25,7968.75 5312.5,7879 5312.5,7362.5 ; J14.6@5643.96,7739.11 5643.96,7736.25 5738.75,7736.25 5769,7706 5769,7415.5 5716,7362.5 5312.5,7362.5
  Secondary Component Side w11: v1(4700,4556.25) 4962.5,4556.25 5250,4843.75 5250,5212.5 5306.25,5268.75 5556.25,5268.75 5581.25,5243.75 5718.75,5243.75 5787.5,5312.5 5787.5,5343.75 5762.5,5368.75 5400,5368.75 5312.5,5456.25 5312.5,5543.75 5331.25,5562.5 5400,5562.5 5449.75,5612.25 5449.75,6193.75 5325,6318.5 5325,6566.01 v1(5162.83,6728.18)
TDI: J14.10 RN12.8 U11.176 | length 5628.1
  Primary Component Side w11: v1(3457.46,5586.3) 3517.55,5586.3 3518.75,5587.5 3631.25,5587.5 3735.85,5482.9 U11.176@4053.75,5482.9 ; v1(3752.61,7137.08) 3955.27,7136.83 4000.83,7136.83 4243.75,7379.75 4243.75,7587.5 4331.25,7675 4481.25,7675 4881.25,8075 5200,8075 5218.75,8093.75 5662.5,8093.75 5687.5,8068.75 5687.5,8034.66 RN12.8@5688.46,8034.66 5688.46,8034.38 5727.89,8034.38 v1(5727.89,8032.66) 5726.21,8030.98 v1@5724.94,8032.25 ; J14.10@5641.25,7581.25 5638.75,7578.75 J14.10@5643.96,7581.61 5643.96,7579 v1(5727.25,7579) v1@5725,7581.25
  Secondary Component Side w11: v1(3457.46,5586.3) 3457.46,5616 3443.75,5629.71 3443.75,5941 3336.4,6048.35 3336.4,6850 3623.23,7136.83 3752.61,7136.83 v1(3752.61,7137.08) ; v1(5727.25,7579) 5727.25,7583.25 5775,7631 5775,7985.54 v1(5727.89,8032.66) v1@5727.89,8029.3
TDO: J14.8 RN12.7 U11.189 | length 5861
  Primary Component Side w11: v1(3462.5,5337.5) 3487.5,5312.5 3487.5,5281.25 3541.95,5226.8 U11.189@4053.75,5226.8 ; v1@5637.5,7985.5 v1(5637,7985) 5638.46,7985 RN12.7@5638.46,8034.66 ; J14.8@5638.75,7657.53 J14.8@5643.96,7660.4 5643.96,7658 v1(5731,7658) v1@5730.53,7657.53
  Secondary Component Side w11: v1(3462.5,5337.5) 3462.5,5393.75 3431.25,5425 3200,5425 3100,5525 3100,5837.5 3307,6044.5 3307,6863.25 3968.75,7525 4088.25,7525 4138.25,7575 4624,7575 4724,7675 5062.5,7675 5372.5,7985 v1(5637,7985) 5637,7752 v1(5731,7658)
TMS: J14.4 RN12.5 U11.127 | length 3400.9
  Primary Component Side w11: U11.127@4715.05,5947.2 4715.05,6150 4512.5,6352.55 4512.5,7380 4707.5,7575 5060.68,7575 v1(5186.42,7700.74) 5186.42,7805.17 5415.91,8034.66 RN12.5@5538.46,8034.66 ; v1(5554.72,7779.74) 5577.98,7803 5643.96,7803 J14.4@5643.96,7817.91 J14.4@5638.75,7815.05
  Secondary Component Side w11: v1(5186.42,7700.74) 5184.05,7700 5474.98,7700 v1(5554.72,7779.74)
VCC_3V3: C9.1 C13.1 C14.1 C15.1 C16.1 C17.1 C18.1 C19.1 C20.1 C21.1 C22.1 C23.1 C24.1 C25.1 C26.1 C27.1 C28.1 C29.1 C30.1 C31.1 C32.1 C33.1 C34.1 C35.1 C36.1 C37.1 C38.1 C39.1 C40.1 C42.1 C46.1 C47.1 C48.1 C50.1 C52.1 C70.1 D4.1 J14.2 R15.2 R16.1 R30.2 RN10.1 RN10.2 RN10.3 RN10.4 RN11.4 RN11.6 RN11.7 RN11.8 RN12.1 RN12.2 RN12.3 RN12.4 RN13.1 RN13.2 RN13.3 RN13.4 RN14.1 RN14.2 RN14.3 RN14.4 U11.5 U11.23 U11.41 U11.63 U11.74 U11.83 U11.85 U11.107 U11.125 U11.143 U11.165 U11.179 U11.186 U11.191 U12.4 U15.36 U16.5 U18.3 | length 5150.5
  Primary Component Side w11: U11.191@4053.75,5187.4 4113.9,5187.4 v1(4113.9,5188.08) ; U11.186@4053.75,5285.9 4114.14,5285.9 4122.19,5277.85 4123.06,5276.22 4123.1,5276.13 v1(4123.25,5276.32) ; U11.179@4053.75,5423.8 4107.65,5423.8 v1(4122.62,5438.78) ; U11.165@4053.75,5699.6 4112.1,5699.6 4113.78,5701.28 v1(4115.06,5700) ; U11.5@4222.55,4762.5 v1@4222.55,4822.59 ; U11.143@4399.85,5947.2 4400,5947.2 v1(4400,5881.25) ; U11.23@4577.15,4762.5 4577.15,4822.73 v1(4577.38,4822.73) ; U11.125@4754.45,5947.2 4754.45,5889.3 4756.31,5887.44 v1(4758.29,5887.44) ; U11.41@4931.75,4762.5 v1(4931.75,4824.5) ; U11.107@5109.05,5947.2 5109.05,5887.05 5108.57,5886.57 v1(5109.11,5886.04) ; v1(5157.47,5251.43) 5158.35,5251.31 5173.24,5266.2 U11.74@5238.45,5266.2 ; v1(5169.26,5050.1) 5165.54,5049.5 U11.63@5238.45,5049.5 ; v1(5172,5500.59) v1@5171.97,5501.87 ; 5187.5,5454.76 5198.76,5443.5 U11.83@5238.45,5443.5 ; U11.85@5238.45,5482.9 5190.94,5482.9 v1@5171.97,5501.87 ; v1@5171.97,5501.87 5170.25,5503.59 5171.93,5503.63 v1@5171.97,5501.87
  Primary Component Side w12: C46.1@4189.71,6464.11 C46.1@4189.71,6464.86 ; C9.1@4281.56,6464.11 C9.1@4281.56,6464.86 C9.1@4281.56,6465
  Primary Component Side w15: v1(5165.89,5454.76) 5187.5,5454.76
  Primary Component Side w20: C13.1@6005.7,5370 6021.74,5370 6021.74,5293.65 U16.5@6027.76,5293.65
  Primary Component Side w30: R16.1@2887.4,5106.71 2887.4,5106.25 v1(2943.75,5106.25) ; v1(2943.75,5825) 2943.75,5795.54 RN11.8@2960.8,5778.49 RN11.7@3010.8,5778.49 RN11.6@3060.8,5778.49 ; RN11.4@3110.8,5655.49 3113.13,5655.49 3136.95,5631.67 v1(3136.95,5614.83) ; C39.1@3487.5,5714.22 C39.1@3491.5,5714.22 ; R30.2@3679.37,5802.47 3679.37,5866.87 v1(3706.25,5893.75) ; C52.1@4056.25,6471.25 4063.39,6464.11 C52.1@4064.02,6463.48 ; RN14.4@5356.16,7244.18 RN14.3@5406.16,7244.18 ; v1(5406.25,7287.5) v1(5406.25,7287.5) RN14.3@5406.16,7244.18 ; v1(5456.25,7287.5) v1(5456.25,7287.5) RN14.2@5456.16,7244.18 ; v1(5498.11,8156.7) 5498.92,8157.5 5498.86,8157.36 5538.33,8157.36 RN12.4@5538.46,8157.66 RN12.3@5588.46,8157.66 RN12.2@5638.46,8157.66 RN12.1@5688.46,8157.66 5728.89,8157.66 v1(5729.41,8157.14) ; RN14.1@5506.16,7244.18 RN14.2@5456.16,7244.18 ; RN13.4@5592.58,7241.82 RN13.3@5642.58,7241.82 RN13.3@5643.08,7241.82 ; RN10.4@5631.05,5874.1 RN10.3@5681.05,5874.1 ; J14.2@5638.75,7893.75 J14.2@5643.96,7896.61 J14.2@5682,7896.61 ; v1(5642.74,7283.85) 5643.08,7283.51 RN13.3@5643.08,7241.82 ; v1(5681.17,5916.2) 5681.05,5916.08 RN10.3@5681.05,5874.1 ; v1(5688.8,7943.39) 5689,7943.19 5689,7903.61 J14.2@5682,7896.61 ; v1(5692.44,7283.85) 5692.58,7283.84 RN13.2@5692.58,7241.82 ; R15.2@5717.18,5087.06 5717.18,5087 5774.51,5087 v1(5774.51,5086.76) ; v1(5731.21,5916.14) 5731.05,5915.98 RN10.2@5731.05,5874.1 ; v1(5737,7897) 5737,7896.61 J14.2@5682,7896.61 ; RN13.1@5742.58,7241.82 RN13.2@5692.58,7241.82 ; RN10.1@5781.05,5874.1 RN10.2@5731.05,5874.1 ; v1(6005,5425) 6005.7,5424.3 C13.1@6005.7,5370 ; RN14.3@5406.16,7244.18 RN14.2@5456.16,7244.18 ; RN13.3@5643.08,7241.82 RN13.2@5692.58,7241.82 ; RN10.3@5681.05,5874.1 RN10.2@5731.05,5874.1
  Primary Component Side w50: C52.1@4056.25,6471.25 4056.25,6464.11 4063.39,6464.11 C46.1@4189.71,6464.11 C9.1@4281.56,6464.11 ; C9.1@4281.56,6465 4328.75,6465 U15.36@4368.75,6425
  Secondary Component Side w20: C21.1@4758.29,5834.94 4760.07,5834.94 C21.1@4762.91,5834.94
  Secondary Component Side w30: v1(4113.9,5188.08) 4171.25,5188.08 4180,5179.33 C14.1@4180,5169.33 C35.1@4180,5079.32 ; v1(4115.06,5700) 4167.75,5700 4171.75,5696 ; v1(4122.62,5438.78) 4122.62,5441.37 C37.1@4185.23,5441.37 4185.23,5531.47 C18.1@4186.14,5531.47 ; v1(4123.25,5276.32) 4184.68,5276.32 C15.1@4184.68,5259.84 4186.09,5259.84 C36.1@4186.09,5350.63 ; C27.1@4170.72,4861.63 4221,4861.63 ; C38.1@4171.75,5729.39 4171.75,5696 ; C19.1@4172.46,5637.24 4171.75,5637.24 4171.75,5696 ; v1(4222.53,4822.59) 4221,4822.59 4221,4861.63 ; C16.1@4272.64,4861.63 4221,4861.63 ; v1@4399.61,5881.25 v1(4400,5881.25) 4400.56,5881.25 4400.56,5824.24 C50.1@4395.79,5824.24 4395.79,5823.33 C20.1@4486.34,5823.33 C20.1@4486.34,5824.24 ; C25.1@4513.3,4854.11 4513.3,4852.01 4578,4852.01 ; v1(4577.38,4822.73) 4578,4822.73 4578,4852.01 ; C17.1@4633.41,4850.58 4633.41,4852.01 4578,4852.01 ; C40.1@4677.44,5831.98 4679.88,5835.65 C21.1@4758.29,5835.65 ; C21.1@4758.29,5834.94 C21.1@4758.29,5835.65 ; v1(4758.29,5887.44) C21.1@4758.29,5835.65 ; C21.1@4767.54,5831.98 4760.07,5834.94 C21.1@4758.29,5835.65 ; C47.1@4879.44,4813.56 4877.74,4820.54 4877.74,4824.9 v1@4931.75,4824.9 ; v1(4931.75,4824.5) v1@4931.75,4824.9 ; C29.1@4984.87,4812.44 4985.25,4818.18 4985.25,4825 4931.75,4825 v1@4931.75,4824.9 ; C34.1@5052.55,5876.12 5052.55,5878.6 5109.11,5878.6 v1@5109.11,5882.01 ; C24.1@5090.55,5191.96 5091.28,5191.96 5091.28,5247 ; C30.1@5091.28,5281.39 5091.28,5247 ; C23.1@5106.02,5371.98 C32.1@5106.02,5462.07 5113.34,5454.76 v1(5165.89,5454.76) v1@5165.67,5454.98 ; C33.1@5106,5642.14 5105.57,5642.14 C26.1@5105.57,5552.62 5105.57,5542.62 5129.96,5542.62 v1(5172,5500.59) ; v1(5109.11,5886.04) v1@5109.11,5882.01 ; C31.1@5120.96,5101.49 5121.42,5101.49 5121.42,5051 ; C28.1@5121.42,5007.3 5121.42,5051 ; C22.1@5163.58,5886.07 5163.58,5876.15 C22.1@5161.76,5880.67 5161.76,5882.01 v1@5109.11,5882.01 ; v1(5169.26,5050.1) 5169.26,5051 5121.42,5051 ; C21.1@4758.29,5835.65 4762.91,5835.65 4762.91,5834.94 C21.1@4758.29,5835.65 ; 5091.28,5247 5095.71,5251.43 v1(5157.47,5251.43) ; v1(5157.47,5251.43) 5158.33,5251.43 5158.32,5251.32 v1(5157.47,5251.43)
  other v1: 6181.55,3940.51 6124.51,3942.88 6179.18,4005.87 6117.38,4008.25 6060,4065 6121,4065 6180,4065 6131.25,4125 6187.5,4125 6131.25,4181.25 6187.5,4181.25 6131.25,4237.5 6187.5,4237.5 5987.5,4287.5 6043.75,4287.5 6100,4287.5 6156.25,4287.5 5987.5,4343.75 6043.75,4343.75 6100,4343.75 6156.25,4343.75 3480.33,5660.96 3481.45,5862.14
VCC_5V_TPS_IN: C4.1 C44.1 C45.1 M2.1 M2.2 M2.3 R26.1 R37.1 R38.1 R41.1 R42.2 U6.3 U14.11 | length 891.8
  Primary Component Side w11: v1(2756.25,2543.75) 2756.48,2543.75 U14.11@2756.48,2494.27
  Primary Component Side w12: C45.1@2482.08,2565.75 C45.1@2492.12,2565.75 ; C4.1@2896.28,1887.5 C4.1@2904.92,1878.86
  Primary Component Side w20: U6.3@2774.26,1944.45 2774.26,1919.45 2806.21,1887.5 C4.1@2896.28,1887.5
  Primary Component Side w29.53: R37.1@2316.25,1512.5 2316.25,1555.67 2403.15,1642.56 2403.15,1657.8 R42.2@2418.38,1657.8
  Primary Component Side w30: R38.1@2316.25,1337.5 R37.1@2316.25,1512.5 ; R26.1@2447.16,2363.17 2492.12,2408.13 C44.1@2492.12,2467.2 ; C45.1@2492.12,2565.75 C45.1@2492.73,2565.75 ; C4.1@2904.92,1878.86 2918.72,1878.86 2919.92,1888.86 2919.92,1926.17 2921.98,1928.23 v1(2920.49,1929.71)
  Primary Component Side w50: C44.1@2492.12,2467.2 C45.1@2492.12,2565.75
  other v1: 2237.68,1310.95 2180.67,1312.79 2237.5,1368.75 2180.95,1371.56 2117.92,1373.43 2056.25,1431.25 2118.75,1431.25 2181.25,1431.25 2237.5,1431.25 2000,1493.75 2056.25,1493.75 2118.75,1493.75 2181.25,1493.75 2237.5,1493.75 2000,1556.25 2056.25,1556.25 2118.75,1556.25 2181.25,1556.25 2237.5,1556.25 2000,1618.75 2056.25,1618.75 2118.75,1618.75 2181.25,1618.75 2237.5,1618.75 2056.25,1675 2118.75,1675 2181.25,1675 2000.86,1675.57 2575.18,2643.9 2622.04,2643.5 2526.92,2644.58 2476.57,2687.81 2526.92,2691.61 2576.15,2691.27 2620.48,2691.69 2418.75,2706.25 2477.99,2735.79 2526.92,2736.27 2574.9,2736.74 2619.88,2737.08 2425,2762.5 2475.62,2782.82 2527.4,2782.35 2574.43,2782.35 2621.26,2784.04 2477.04,2833.18 2524.55,2833.65 2575.38,2833.18